# Altium PCB Exp 11a_Rev-1.PcbDoc
Units mm, origin at the board's own origin, x right, y up, seen from the top; angles counter-clockwise.
Board outline 134.49 x 84.46 mm, 2 copper layers (Top Layer, Bottom Layer); 44 components, 34 nets, 146 pads, 16 vias.
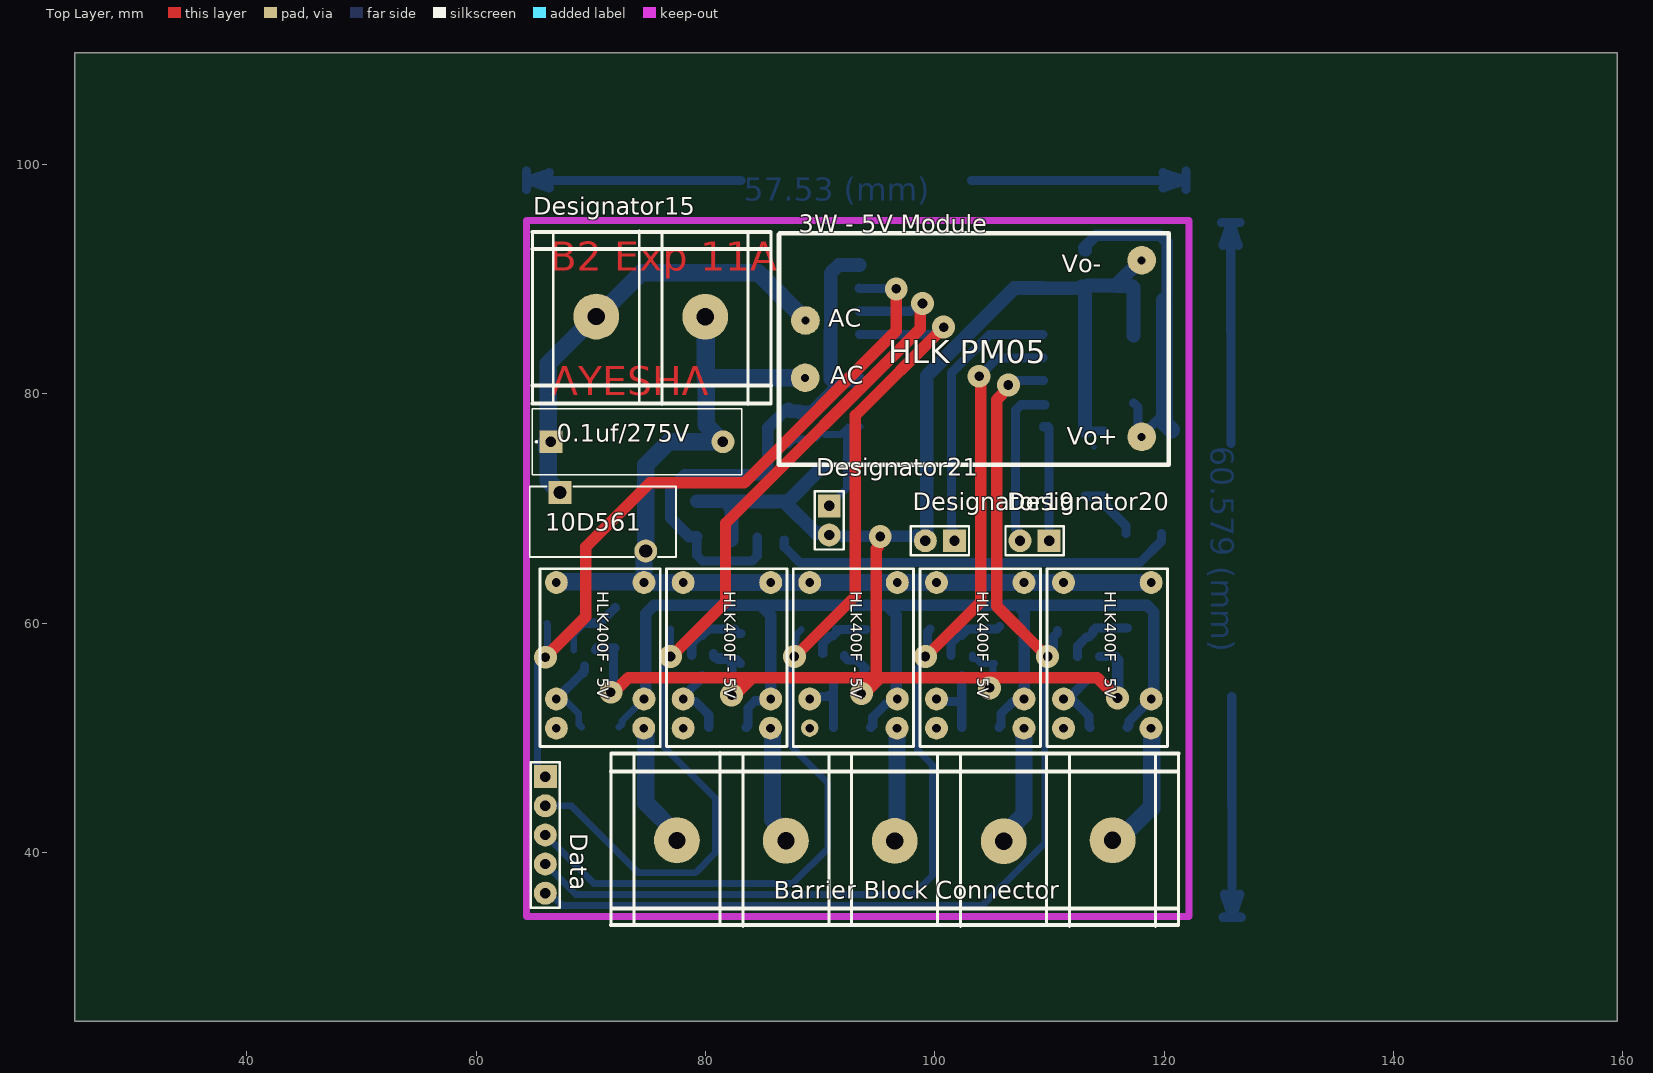
[diagram p0: Top Layer view]
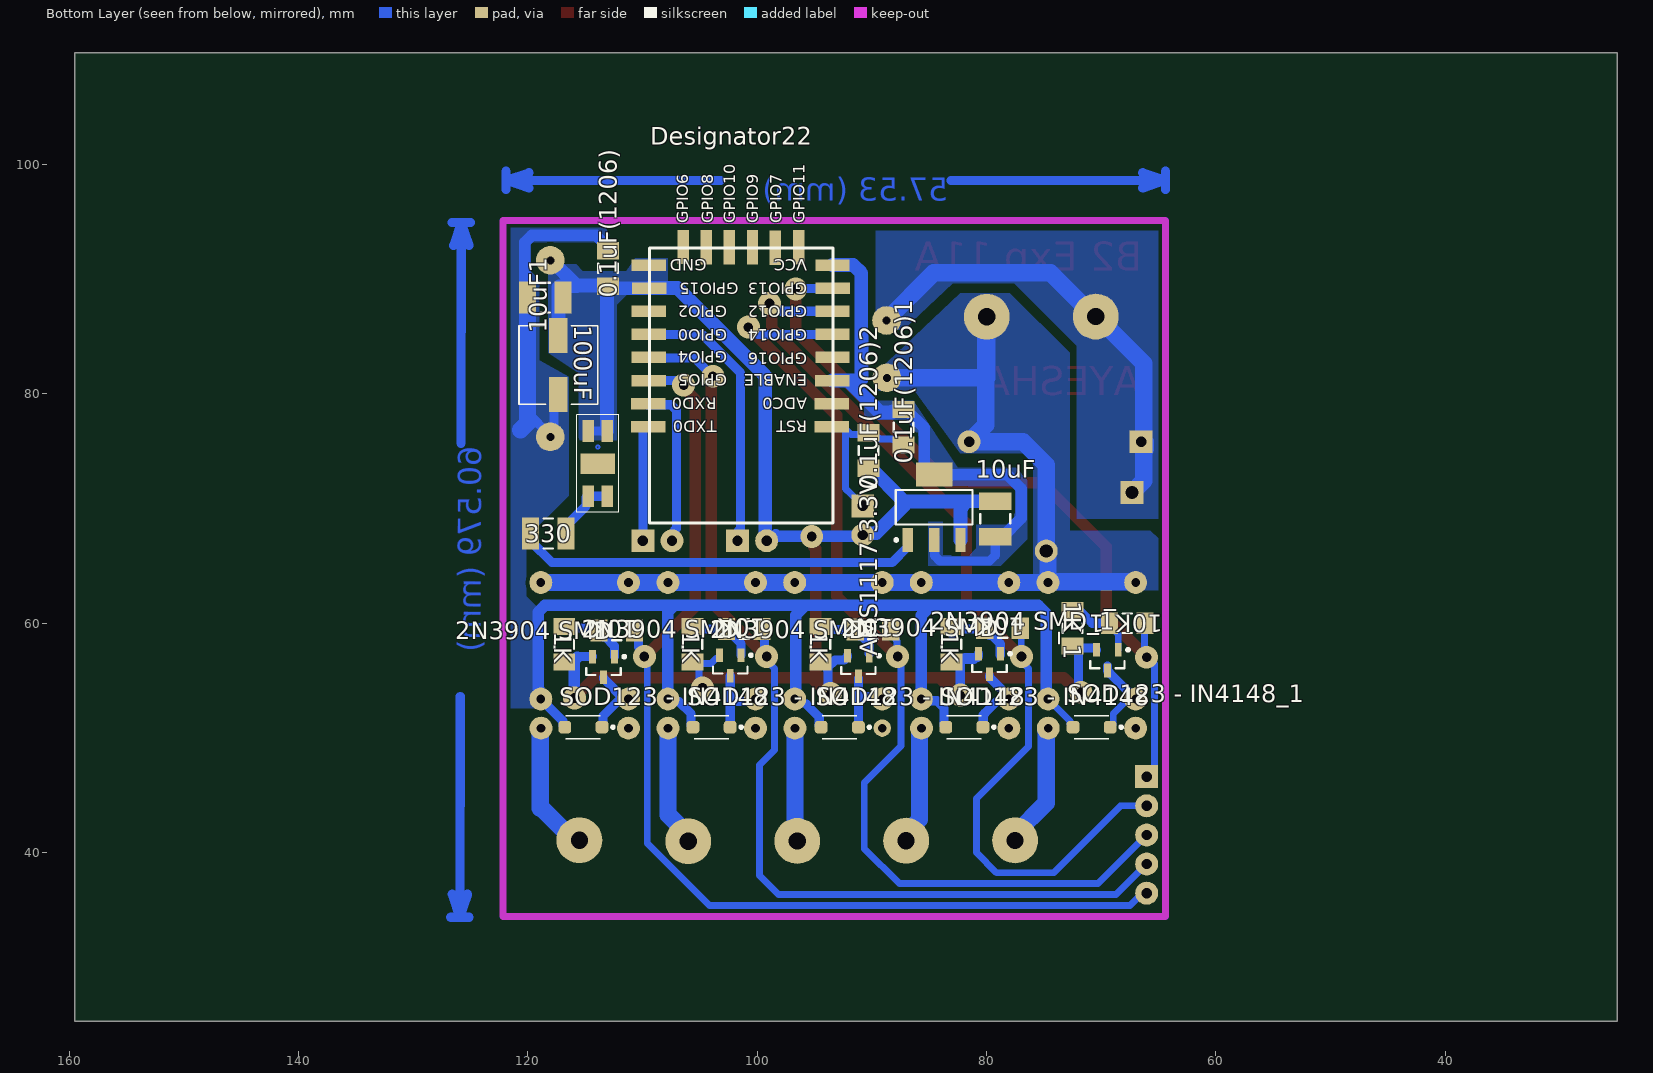
[diagram p1: Bottom Layer view, seen from below]

## Layer stack, top to bottom
Top Solder: solder mask 0.0102, Solder Resist, Dk 3.5
Top Layer: signal copper 0.0356
Dielectric 1: dielectric 0.32, FR-4, Dk 4.8
Bottom Layer: signal copper 0.0356
Bottom Solder: solder mask 0.0102, Solder Resist, Dk 3.5

## Board outline
25.019,25.273 159.512,25.273 159.512,109.728 25.019,109.728

## Design rules (kind name [scope] priority, off if disabled: settings)
Clearance [All] p1: gap=0.35 ignorepadtopadclearanceinfootprint=FALSE
PlaneClearance [All] p1: clearance=0.6
PlaneConnect [All] p1: planeconnectstyle=Direct reliefexpansion=0.508 reliefentries=4 reliefconductorwidth=0.254 reliefairgap=0.254
PolygonConnect PolygonConnect_2 [All] p1: connectstyle=Direct reliefconductorwidth=0.254 reliefentries=4 polygonreliefangle="90 Angle" airgapwidth=0.254
PolygonConnect PolygonConnect_1 [All] p2: connectstyle=Direct reliefconductorwidth=0.254 reliefentries=4 polygonreliefangle="90 Angle" airgapwidth=0.254
PolygonConnect [All] p3: connectstyle=Direct reliefconductorwidth=0.254 reliefentries=4 polygonreliefangle="90 Angle" airgapwidth=0.254
RoutingVias [All] p1: holewidth=0.711 width=1.27 viastyle="Through Hole" minholewidth=0.711 minwidth=1.27 maxholewidth=0.711 maxwidth=1.27
SolderMaskExpansion [All] p1: expansion=0.102 istentingtop=FALSE
Width [All] p1: maxlimit=1.5 minlimit=0.6 preferedwidth=1 minimp=50.000000 maximp=50.000000 favimp=50.000000
28 further rules are at their usual default settings.

## Components (designator, comment, footprint, x,y, rotation, side; value= is the part's Value field where it differs from the comment)
0.1uF(1206) "Comment" CAPC3216M 113.03,90.932 r90 bottom
0.1uF(1206)1 "Comment" CAPC3216M 87.249,77.089 r90 bottom
0.1uF(1206)2 "Comment" CAPC3216M 90.297,75.057 r90 bottom
0.1uf/275V "Comment" CAP_ECQ-UAAF104MA_PAN 66.534,75.819 r0 top
1K "Comment" RESC3216M 83.058,58.166 r270 bottom
1K "Comment" RESC3216M 94.488,58.166 r270 bottom
1K "Comment" RESC3216M 105.664,58.166 r270 bottom
1K "Comment" RESC3216M 116.84,58.166 r270 bottom
1K_1 "Comment" RESC3216M 72.517,59.563 r270 bottom
"2N3904 SMD" "Comment" SOT23-3L 79.756,56.432 r270 bottom
"2N3904 SMD" "Comment" SOT23-3L 91.186,56.261 r270 bottom
"2N3904 SMD" "Comment" SOT23-3L 102.362,56.305 r270 bottom
"2N3904 SMD" "Comment" SOT23-3L 113.411,56.178 r270 bottom
"2N3904 SMD_1" "Comment" SOT23-3L 69.469,56.769 r270 bottom
"3W - 5V Module" "Comment" HLK-PM05 103.378,83.947 r0 top
10D561 "Comment" MOV-10D561K_BRN 67.31,71.399 r0 top
10K "Comment" RESC3216M 78.613,59.563 r0 bottom
10K "Comment" RESC3216M 89.916,59.436 r0 bottom
10K "Comment" RESC3216M 101.14,59.479 r0 bottom
10K "Comment" RESC3216M 112.268,59.353 r0 bottom
10K_1 "Comment" RESC3216M 67.739,59.987 r0 bottom
10uF "Comment" CAPC3225M 79.248,69.088 r90 bottom
10uF1 "Comment" CAPC3225M 118.491,88.392 r180 bottom
100uF "Comment" CHEMI-F80 117.348,82.512 r270 bottom
330 "Comment" RESC3225M 118.237,67.818 r180 bottom
AMS1117-3.3V "Comment" SOT223-4L 84.582,70.104 r90 bottom
"Barrier Block Connector" "Comment" "Barrier Block Connector"#1 96.52,41.021 r90 top
Data "Comment" HDR1X5 66.04,46.609 r270 top
Designator15 "Comment" "Barrier Block Connector"#2 60.985,86.747 r270 top
Designator19 "Comment" HDR1X2 101.727,67.183 r180 top
Designator20 "Comment" HDR1X2 109.982,67.183 r180 top
Designator21 "Comment" HDR1X2 90.805,70.231 r270 top
Designator22 "Comment" esp8266-12F 101.473,84.963 r90 bottom
"SOD123 - IN4148" "Comment" SODFL3718X108N 81.966,50.927 r0 bottom
"SOD123 - IN4148" "Comment" SODFL3718X108N 92.831,50.927 r0 bottom
"SOD123 - IN4148" "Comment" SODFL3718X108N 104.013,50.927 r0 bottom
"SOD123 - IN4148" "Comment" SODFL3718X108N 115.189,50.927 r0 bottom
"SOD123 - IN4148_1" "Comment" SODFL3718X108N 70.866,50.927 r0 bottom
? "Comment" HLK400F-5V#1 115.062,57.194 r270 top
? "Comment" HLK400F-5V#2 92.921,57.194 r270 top
? "Comment" HLK400F-5V#1 103.977,57.194 r270 top
? "Comment" HLK400F-5V#1 81.879,57.194 r270 top
? "Comment" SMD-LED 113.919,73.914 r90 bottom
? "Comment" HLK400F-5V#1 70.823,57.194 r270 top

## Footprints (in the part's own frame and the unit in brackets; to place one, negate y for a bottom-side part, rotate by r counter-clockwise, add the part's x,y. Pads: shape width x height; smd on the part's side, far side on the other; paste and mask are expansions set on the pad)
"Barrier Block Connector"#1 [mm] "5 pin Barrier Block Connector"
  round 4 hole 1.5: 1(0.031,19) 2(0.006,9.5) 3(-0.019,0) 4(-0.044,-9.5) 5(0.044,-19)
  silkscreen extent -7.47,-24.75 7.68,24.75
"Barrier Block Connector"#2 [mm] "8 pin Barrier Block Connector"
  round 4 hole 1.5: 1(0.031,19) 2(0.006,9.5)
  silkscreen extent -7.47,3.94 7.68,24.75
CAP_ECQ-UAAF104MA_PAN [mm]
  rect 2x2 hole 0.914 mask+0: 1(0,0)
  round 2 hole 0.914 mask+0: 2(15,0)
  silkscreen extent -1.63,-2.88 16.63,2.88, body extent -1.5,-2.76 16.5,2.76, height 12.5
CAPC3216M [mm] "Chip Capacitor, Body 3.2x1.6mm, IPC Low Density"
  rect 1.5x1.9 smd: 1(-1.55,0) 2(1.55,0)
  silkscreen extent -0.4,-0.85 0.4,0.85, body extent -1.7,-0.9 1.7,0.9, height 1.35
CAPC3225M [mm] "Chip Capacitor, Body 3.2x2.5mm, IPC Low Density"
  rect 1.5x2.8 smd: 1(-1.55,0) 2(1.55,0)
  silkscreen extent -0.4,-1.3 0.4,1.3, body extent -1.7,-1.35 1.7,1.35, height 1.35
CHEMI-F80 [mil]
  rect 120x63 smd paste+0 mask+0: 1(-101.5,0) 2(101.5,0)
  silkscreen extent -135,-135 135,135, body extent -141,-130 141,130, height 305
esp8266-12F [mm]
  rect 1x3 smd: 0(-7.837,-7.979) 0(-7.836,8.029) 0(-5.812,-7.954) 0(-5.811,8.054) 0(-3.812,-8.004) 0(-3.811,8.004) 0(-1.787,-8.029) 0(-1.786,7.979) 0(0.212,-8.029) 0(0.213,7.979) 0(2.237,-8.029) 0(2.238,7.979) 0(4.237,-8.054) 0(4.238,7.954) 0(6.262,-8.029) 0(6.263,7.979)
  rect 3x1 smd: 0(7.787,-3.054) 0(7.812,-5.079) 0(7.812,-1.054) 0(7.812,0.971) 0(7.812,2.971) 0(7.838,4.996)
  silkscreen extent -16.24,-8.07 7.76,7.93
HDR1X2 [mm] "Connector; Header; 2 Position"
  rect 2x2 hole 0.9: 1(0,0)
  round 2 hole 0.9: 2(2.54,0)
  silkscreen extent -1.27,-1.27 3.81,1.27
HDR1X5 [mm] "Connector; Header; 5 Position"
  rect 2x2 hole 0.9: 1(0,0)
  round 2 hole 0.9: 2(2.54,0) 3(5.08,0) 4(7.62,0) 5(10.16,0)
  silkscreen extent -1.27,-1.27 11.43,1.27
HLK400F-5V#1 [mm]
  round 2 hole 0.762: "Coil B"(3.81,-3.817) CoilA(3.81,3.818) Common(-6.35,3.818) Common(-6.35,-3.817) NC(6.35,-3.817) NO(6.35,3.802)
  silkscreen extent -7.55,-5.26 7.95,5.24
HLK400F-5V#2 [mm]
  round 2 hole 0.762: "Coil B"(3.81,-3.817) CoilA(3.81,3.818) Common(-6.35,3.818) Common(-6.35,-3.817) NO(6.35,3.802)
  round 1.524 hole 0.762: NC(6.35,-3.817)
  silkscreen extent -7.55,-5.26 7.95,5.24
HLK-PM05 [mm]
  round 2.5 hole 0.7: 0(-14.65,2.45) 1(-14.675,-2.55) 2(14.675,7.7) 3(14.675,-7.7)
  silkscreen extent -16.96,-10.15 17.03,10.07
MOV-10D561K_BRN [mm]
  rect 2x2 hole 1.143 mask+0: 1(0,0)
  round 2 hole 1.143 mask+0: 2(7.493,-5.105)
  silkscreen extent -2.63,-5.63 10.12,0.52
RESC3216M [mm] "Chip Resistor, Body 3.2x1.6mm, IPC Low Density"
  rect 1.5x1.9 smd: 1(-1.55,0) 2(1.55,0)
  silkscreen extent -0.4,-0.85 0.4,0.85, body extent -1.68,-0.87 1.68,0.87, height 0.71
RESC3225M [mm] "Chip Resistor, Body 3.2x2.5mm, IPC Low Density"
  rect 1.5x2.8 smd: 1(-1.55,0) 2(1.55,0)
  silkscreen extent -0.4,-1.3 0.4,1.3, body extent -1.68,-1.32 1.68,1.32, height 0.71
SMD-LED [mm] "SMD LED PCB"
  rect 1.9x1 smd: 1(-2.85,0.82) 2(-2.85,-0.82) 3(2.85,-0.82) 4(2.85,0.82)
  rect 1.8x3 smd: 5(0,0)
  Top Layer circle w0.154: c1.441,-0.01 r0.149
  silkscreen extent -4.25,-1.84 4.25,1.82
SODFL3718X108N [mm]
  rrect50% 1.12x1.08 smd: A(1.6,0) C(-1.645,0)
  silkscreen extent -2.72,-1 1.5,1
SOT23-3L [mm] "SOT23, 3-Leads, Body 2.9x1.3mm, Pitch 0.95mm, Lead Span 2.5mm, IPC High Density"
  rect 1.2x0.6 smd: b(-0.9,0.95) c(0.9,0) e(-0.9,-0.95)
  silkscreen extent -1.02,-1.5 0.7,1.92, body extent -0.7,-1.5 0.7,1.5, height 1.1
SOT223-4L [mm] "SOT223, 4-Leads, Body 6.5x3.5mm, Pitch 2.3mm, Lead Span 7mm, IPC High Density"
  rect 2.1x0.9 smd: 1(-2.85,2.3) 2(-2.85,0) 3(-2.85,-2.3)
  rect 2.1x3.2 smd: 4(2.85,0)
  silkscreen extent -2.97,-3.35 1.5,3.43, body extent -1.85,-3.35 1.85,3.35, height 1.8

## Via types
v1: diameter 2, hole 0.85, Top Layer to Bottom Layer, 16 vias

## Nets (pads, with @x,y where several pads share a name; then routed paths per layer and width w, separated by ;. In a path a pad name is that pad's centre, name@x,y a point inside that pad or via, vN(x,y) a via of type N, cw(c..) or ccw(c..) an arc to the next point about the centre after c; other vN are vias at no path point)
"AC GND": 0.1uf/275V.1 10D561.1 "3W - 5V Module.0" Designator15.2 | length 39.3
  Bottom Layer w1.5: 0.1uf/275V.1@66.167,75.819 66.167,75.184 66.294,75.057 66.294,72.415 10D561.1 ; 0.1uf/275V.1@66.294,75.819 66.294,82.644 70.391,86.741 Designator15.2@70.579,86.741 ; Designator15.2 70.612,86.741 74.422,90.551 84.619,90.551 88.773,86.397
"AC Live": 0.1uf/275V.2 10D561.2 "3W - 5V Module.1" ?.Common Designator15.1 | length 95.8
  Bottom Layer w0.8: ?.Common@67.005,63.544 ?.Common@67.27,63.279
  Bottom Layer w1.5: ?.Common@67.013,63.545 67.017,63.548 67.539,63.548 67.593,63.602 74.576,63.602 74.634,63.544 ?.Common@74.64,63.544 ; ?.Common@74.484,63.602 74.647,63.765 10D561.2@74.647,66.265 ; ?.Common@74.549,63.544 78.062,63.544 85.697,63.544 89.103,63.544 96.738,63.544 100.16,63.544 107.795,63.544 ?.Common@111.209,63.544 ; 10D561.2@74.774,66.265 10D561.2 74.803,73.787 76.835,75.819 0.1uf/275V.2 80.079,77.274 80.079,81.397 80.079,86.622 Designator15.1 79.985,81.397 88.703,81.397 ; ?.Common@111.245,63.544 ?.Common@118.88,63.544
B1: 1K.1@116.84,59.716 10K.2@113.818,59.353 "2N3904 SMD.b"@112.461,57.078 | length 6
  Bottom Layer w0.8: 112.461,57.078 112.461,57.996 113.268,58.803 113.468,58.803 113.818,59.153 113.818,59.353 114.028,59.563 1K.1@116.822,59.563
B2: 1K.1@105.664,59.716 10K.2@102.69,59.479 "2N3904 SMD.b"@101.412,57.205 | length 6
  Bottom Layer w0.8: 101.412,57.205 101.412,58.201 102.14,58.929 102.34,58.929 102.69,59.279 102.69,59.479 105.427,59.479 1K.1@105.664,59.716
B3: 1K.1@94.488,59.716 10K.2@91.466,59.436 "2N3904 SMD.b"@90.236,57.161 | length 5.2
  Bottom Layer w0.8: 90.236,57.361 90.236,58.206 90.916,58.886 91.116,58.886 91.466,59.236 91.466,59.436 1K.1@94.013,59.436
B4: 1K.1@83.058,59.716 10K.2@80.163,59.563 "2N3904 SMD.b"@78.806,57.332 | length 6.1
  Bottom Layer w0.8: 78.806,57.205 78.806,58.201 79.534,58.929 79.734,58.929 80.084,59.279 80.084,59.479 82.525,59.479 82.906,59.098 1K.1@83.106,59.098
B5: 1K_1.1 10K_1.2 "2N3904 SMD_1.b" | length 6
  Bottom Layer w0.6: 68.519,57.669 68.519,59.017 69.289,59.787 10K_1.2
  Bottom Layer w0.8: 10K_1.2 70.782,59.987 1K_1.1@72.136,61.341
C1: "2N3904 SMD.c"@113.411,55.278 "?.Coil B"@111.245,53.384 "SOD123 - IN4148.C"@113.544,50.927 | length 6.4
  Bottom Layer w0.8: 111.245,53.384 111.245,53.519 ; 111.251,53.384 111.481,53.154 112.2,53.154 113.466,51.888 113.466,51.005 113.544,50.927 ; 111.753,53.519 113.411,55.178 113.411,55.278
C2: "2N3904 SMD.c"@102.362,55.405 "?.Coil B"@100.16,53.384 "SOD123 - IN4148.C"@102.368,50.927 | length 6.3
  Bottom Layer w0.8: 100.16,53.384 100.39,53.154 101.854,53.154 ; 102.362,55.405 102.362,50.933 102.368,50.927
C3: "2N3904 SMD.c"@91.186,55.361 "?.Coil B"@89.103,53.384 "SOD123 - IN4148.C"@91.186,50.927 | length 6.6
  Bottom Layer w0.8: 89.103,53.384 89.333,53.613 90.707,53.613 90.805,53.711 91.186,53.33 ; 91.186,50.927 91.186,53.33 ; 91.186,55.161 91.186,53.33
C4: "2N3904 SMD.c"@79.756,55.532 "?.Coil B"@78.062,53.384 "SOD123 - IN4148.C"@80.321,50.927 | length 6.6
  Bottom Layer w0.8: 79.756,55.405 79.756,55.305 78.062,53.611 78.062,53.384 78.292,53.154 79.15,53.154 80.158,52.146 80.158,52.126 80.298,51.986 80.298,50.95 80.321,50.927
C5: "2N3904 SMD_1.c" "?.Coil B"@67.005,53.384 "SOD123 - IN4148_1.C" | length 7.5
  Bottom Layer w0.6: 67.005,53.384 67.273,53.116 67.915,53.116 68.961,52.07 68.961,51.167 69.201,50.927 69.221,50.927
  Bottom Layer w0.8: 67.005,53.384 69.291,55.669 69.369,55.669 ; 69.469,55.847 69.469,56.261
"DC GND": 0.1uF(1206)2.1 0.1uF(1206).1 1K.2 1K_1.2 10uF1.2 10uF.2 100uF.1 "2N3904 SMD.e" "2N3904 SMD_1.e" "3W - 5V Module.2" ?.3 ?.4 AMS1117-3.3V.3 Designator19.2 Designator21.2 Designator22.0@109.427,89.201 Designator22.0@109.452,91.226 | length 178.3
  Top Layer w1: v1(71.755,53.975) 72.026,53.975 73.284,55.234 84.079,55.234 ; v1(82.296,53.721) 82.567,53.721 84.079,55.234 ; v1(93.599,53.848) 93.87,53.848 95.255,55.234 ; v1(95.25,67.564) 95.059,67.373 95.059,66.666 94.888,66.495 94.888,55.6 95.255,55.234 ; v1(115.951,53.467) 115.948,53.467 114.182,55.234 95.255,55.234 ; 84.079,55.234 95.255,55.234
  Bottom Layer w0.6: 103.312,57.205 103.312,56.905 103.612,56.905 104.042,56.475 105.214,56.475 105.073,56.334 v1@105.073,55.033
  Bottom Layer w0.8: 70.419,57.669 70.519,57.769 70.519,57.845 72.121,57.845 71.985,57.709 71.985,54.205 v1(71.755,53.975) ; 10uF.2@79.655,70.612 79.75,70.517 81.756,70.517 82.156,70.117 ; 80.706,57.205 80.706,57.105 80.806,57.005 80.933,57.005 ; 80.706,57.332 80.706,57.232 80.933,57.005 ; v1(82.296,53.721) 82.296,56.608 82.065,56.839 ; 1K.2@83.058,56.489 82.708,56.839 82.065,56.839 ; 92.136,57.161 92.136,57.061 92.424,56.773 93.231,56.773 93.938,56.066 93.829,55.957 93.829,54.078 v1(93.599,53.848) ; ?.3@113.199,76.764 ?.4 ; 114.361,57.078 115.634,57.078 115.697,57.015 ; 80.933,57.005 81.899,57.005 82.065,56.839 ; 80.933,57.005 81.099,56.839 82.065,56.839
  Bottom Layer w1: Designator21.2 90.932,67.564 v1(95.25,67.564) 98.281,67.564 98.408,67.691 98.916,67.183 Designator19.2 ; 115.697,57.015 115.951,56.761 v1(115.951,53.467)
  Bottom Layer w1.2: 10uF.2 79.266,70.62 81.653,70.62 81.661,70.612 82.156,70.612 87.202,70.612 90.097,73.507 90.297,73.507 ; 82.156,70.117 82.282,69.991 AMS1117-3.3V.3 ; 87.121,70.358 89.635,67.844 Designator21.2@90.805,67.844 ; Designator19.2 99.314,67.31 99.314,81.583 106.959,89.227 109.401,89.227 109.427,89.201 112.649,89.201 112.83,89.382 113.03,89.382 ; ?.3@113.199,76.764 ?.3 113.099,89.232 113.324,89.457 115.78,89.457 117.97,91.647 118.053,91.647 ; 115.78,89.382 117.254,89.382 117.348,89.288 100uF.1
  other v1: 104.775,54.356
FLASH: Designator19.1 Designator22.0@109.452,85.176 | length 24.3
  Bottom Layer w0.8: Designator19.1@102.235,67.183 101.635,67.783 101.635,68.087 101.47,68.252 101.47,81.829 104.817,85.176 Designator22.0@109.452,85.176
GPIO4: 10K.1@99.59,59.479 Data.4 Designator22.0@109.452,83.177 | length 93.3
  Top Layer w1: Data.4 Data.4@66.231,38.798 ; v1(99.181,57.084) 99.248,57.084 104.013,61.849 104.013,81.4 v1(103.879,81.534)
  Bottom Layer w0.6: Data.4 68.702,36.327 98.146,36.327 99.822,38.003 99.822,47.625 98.51,48.937 98.51,56.033 99.181,56.705 v1@99.181,57.249 ; v1@99.386,57.275 10K.1@99.386,59.275
  Bottom Layer w0.8: v1(99.181,57.084) 99.386,57.288 99.386,59.275 10K.1@99.59,59.479 ; v1(103.879,81.534) 105.463,83.117 109.393,83.117 Designator22.0@109.452,83.177
GPIO5: 10K.1@110.718,59.353 Data.5 Designator22.0@109.477,81.152 | length 94.5
  Top Layer w1: v1(106.426,80.772) 106.426,80.501 105.41,79.485 105.41,61.468 109.794,57.084 v1(109.855,57.084)
  Bottom Layer w0.6: Data.5 66.419,36.449 67.491,35.377 104.167,35.377 109.601,40.811 109.601,50.154 109.595,50.16 109.595,56.763 109.855,57.023 v1(109.855,57.084)
  Bottom Layer w0.8: v1(106.426,80.772) 106.624,80.772 107.003,81.152 Designator22.0@109.477,81.152 ; v1(109.855,57.084) 109.855,57.408 110.368,57.921 110.368,58.803 110.718,59.153 10K.1@110.718,59.353
GPIO12: 10K.1@77.063,59.563 Data.2 Designator22.0@93.444,87.2 | length 85.6
  Top Layer w1: Data.2 Data.2@66.311,44.069 ; v1(76.957,57.084) 77.023,57.084 81.757,61.818 81.757,68.692 98.742,85.677 98.742,87.693 v1(98.933,87.884)
  Bottom Layer w0.6: Data.2 68.326,44.069 74.168,38.227 79.121,38.227 80.899,40.005 80.899,44.704 76.348,49.255 76.348,56.031 76.957,56.639 v1(76.957,57.084) ; v1@76.984,57.052 10K.1@76.984,59.479
  Bottom Layer w0.8: Designator22.0@93.444,87.2 97.925,87.2 98.608,87.884 v1(98.933,87.884)
GPIO13: 10K_1.1 Data.1 Designator22.0@93.419,89.2 | length 67.3
  Top Layer w1: Data.1 Data.1@66.484,47.053 ; v1(66.04,57.023) 69.565,60.548 69.565,66.644 75.153,72.232 83.388,72.232 96.647,85.492 96.647,88.756 v1@96.52,88.883
  Bottom Layer w0.6: Data.1 65.355,47.294 65.355,56.48 66.04,57.164 66.04,57.531 66.241,57.732 66.241,59.934 10K_1.1
  Bottom Layer w0.8: Designator22.0@93.419,89.2 93.442,89.177 96.624,89.177 v1(96.647,89.154)
GPIO14: 10K.1@88.366,59.436 Data.3 Designator22.0@93.444,85.175 | length 90.2
  Top Layer w1: v1(87.757,57.084) 87.818,57.084 93.091,62.357 93.091,78.117 v1(100.783,85.809)
  Bottom Layer w0.6: Data.3 70.292,37.277 87.599,37.277 90.678,40.356 90.678,46.066 87.453,49.291 87.453,56.261 87.489,56.297 87.489,56.816 87.832,57.159 87.832,58.435 87.916,58.518 87.916,58.986 10K.1@88.366,59.436
  Bottom Layer w0.8: Designator22.0@93.444,85.175 99.964,85.175 100.598,85.809 v1(100.783,85.809)
LED-R: 330.2 ?.1 ?.2 | length 5.7
  Bottom Layer w0.8: ?.2 ?.1 ; ?.1@114.84,71.064 114.94,70.964 114.94,70.215 116.687,68.468 330.2
NO1: "Barrier Block Connector.5" ?.NO@118.864,50.844 | length 11.5
  Bottom Layer w1.5: 115.52,41.065 116.02,41.065 118.804,43.849 ; ?.NO@118.853,50.844 118.858,50.844 118.931,50.771 118.931,43.849
NO2: "Barrier Block Connector.4" ?.NO@107.78,50.844 | length 10.6
  Bottom Layer w1.5: 106.02,40.977 106.02,41.518 107.78,43.278 ?.NO@107.78,50.844
NO3: "Barrier Block Connector.3" ?.NO@96.723,50.844 | length 10
  Bottom Layer w1.5: 96.596,41.186 96.824,40.958 ; 96.723,41.186 ?.NO@96.723,50.844
NO4: "Barrier Block Connector.2" ?.NO@85.682,50.844 | length 10.4
  Bottom Layer w1.5: ?.NO@85.682,50.844 85.778,50.748 85.778,50.394 85.852,50.32 85.852,42.872 87.02,41.704 87.02,41.027
NO5: "Barrier Block Connector.1" ?.NO@74.625,50.844 | length 11
  Bottom Layer w1.5: ?.NO@74.625,50.844 74.625,50.708 74.803,50.531 74.803,44.323 77.52,41.606 77.52,41.052
"P +Vo": 
"P -Vo": 
RST: 0.1uF(1206)1.1 0.1uF(1206)2.2 Designator21.1 Designator22.0@93.494,77.126 | length 14.3
  Bottom Layer w0.6: 87.249,75.539 87.699,75.989 88.166,75.989 88.25,76.073 89.296,76.073 89.38,76.157 89.647,76.157 90.097,76.607 90.297,76.607 90.45,76.454 91.823,76.454 Designator22.0@92.294,76.926 ; Designator21.1 91.892,71.318 92.294,71.72 Designator22.0@92.294,76.926 ; Designator22.0@93.494,77.126 92.494,77.126 Designator22.0@92.294,76.926
RXD0: Designator20.2 Designator22.0@109.527,79.152 | length 14.3
  Bottom Layer w0.8: Designator20.2 107.212,67.413 107.212,68.1 107.061,68.252 107.061,78.583 107.53,79.052 Designator22.0@109.609,79.052
SOT-Vin: 
SOT-Vout: 
TXD0: Designator20.1 Designator22.0@109.502,77.127 | length 10.4
  Bottom Layer w0.8: Designator22.0@109.502,77.127 109.882,77.127 109.982,77.027 Designator20.1
"VCC 3V": 0.1uF(1206)1.2 10uF.1 AMS1117-3.3V.2 AMS1117-3.3V.4 Designator22.0@93.444,91.225 Designator22.0@93.469,81.151 | length 50.4
  Bottom Layer w0.8: 10uF.1 79.248,65.913 79.756,65.405 84.063,65.405 84.532,65.874 AMS1117-3.3V.2@84.532,67.485
  Bottom Layer w1: 10uF.1 78.598,67.538 76.998,69.138 76.998,71.74 78.212,72.954 AMS1117-3.3V.4 84.899,72.954 85.449,73.504 85.449,77.039 87.049,78.639 87.249,78.639
  Bottom Layer w1.2: 87.249,78.639 87.399,78.489 88.18,78.489 88.302,78.367 89.296,78.367 Designator22.0@92.082,81.153 ; Designator22.0@93.444,91.225 91.631,91.225 90.928,90.523 90.928,85.486 90.903,85.461 90.903,81.269 91.019,81.153 Designator22.0@92.082,81.153 ; Designator22.0@93.469,81.151 93.467,81.153 Designator22.0@92.082,81.153
"VCC 5V": 0.1uF(1206).2 10uF1.1 100uF.2 330.1 "3W - 5V Module.3" "SOD123 - IN4148.A" "SOD123 - IN4148_1.A" ?.CoilA AMS1117-3.3V.1 | length 170.1
  Bottom Layer w0.6: 72.466,50.927 72.486,50.927 72.726,51.167 72.726,51.469 72.975,51.719 ?.CoilA@74.411,53.154 ; 95.717,52.918 95.894,52.918 96.36,53.384 ?.CoilA@96.738,53.384
  Bottom Layer w0.8: ?.CoilA@74.411,53.154 ?.CoilA@74.64,53.384 ; 83.566,50.927 83.586,50.927 83.726,51.067 83.726,52.611 84.342,53.227 85.541,53.227 ?.CoilA@85.697,53.384 ; AMS1117-3.3V.1 86.882,66.654 88.242,65.294 111.842,65.294 111.858,65.278 117.897,65.278 119.787,67.168 330.1 ; 94.431,50.927 94.451,50.927 94.591,51.067 94.591,51.792 95.717,52.918 ; 105.613,50.927 105.633,50.927 105.773,51.067 105.773,52.098 106.829,53.154 107.565,53.154 ?.CoilA@107.795,53.384 ; 116.789,50.927 116.809,50.927 116.949,51.067 116.949,51.453 ?.CoilA@118.88,53.384 ; 100uF.2@117.348,79.21 117.728,78.83 117.728,76.572 ; 118.046,76.334 120.041,78.33
  Bottom Layer w1: ?.CoilA@74.64,53.384 74.803,53.546 74.803,60.833 75.51,61.54 84.836,61.54 ; ?.CoilA@85.697,53.384 85.697,60.679 84.836,61.54 ; ?.CoilA@96.738,53.384 96.647,53.475 96.647,60.706 95.813,61.54 ; ?.CoilA@107.795,53.384 107.823,53.412 107.823,60.96 107.243,61.54 ; 113.03,92.482 113.23,92.482 112.981,92.731 114.066,93.815 119.683,93.815 120.269,93.229 120.269,88.616 10uF1.1@119.916,88.263 ; ?.CoilA@118.88,53.384 119.071,53.575 119.071,54.282 119.126,54.337 119.126,60.954 118.54,61.54 107.243,61.54 ; 84.836,61.54 95.813,61.54 ; 95.813,61.54 107.243,61.54
  Bottom Layer w1.5: 10uF1.1@120.041,88.138 120.041,78.33 120.041,77.447 120.65,76.838
pads on no net: ?.5 ?.NC Designator22.0@93.444,83.176 Designator22.0@93.519,79.151 Designator22.0@96.394,92.775 Designator22.0@98.419,92.75 Designator22.0@100.419,92.775 Designator22.0@102.444,92.775 Designator22.0@104.444,92.775 Designator22.0@106.469,92.801 Designator22.0@109.452,87.201
copper on no net: | length 99.2
  Bottom Layer w0.8: 64.39,97.817 64.39,99.417 ; 66.39,97.95 64.39,98.617 ; 66.39,99.284 64.39,98.617 ; 83.104,98.617 64.39,98.617 ; 103.206,98.617 121.92,98.617 ; 119.92,97.95 121.92,98.617 ; 119.92,99.284 121.92,98.617 ; 121.92,97.817 121.92,99.417 ; 125.017,94.929 126.617,94.932 ; 125.144,34.35 126.744,34.353 ; 125.154,92.929 125.817,94.931 ; 125.273,36.35 125.944,34.352 ; 125.857,75.692 125.817,94.931 ; 125.903,53.59 125.944,34.352 ; 126.488,92.932 125.817,94.931 ; 126.606,36.353 125.944,34.352

## Polygon pours and split planes (outlines as drawn)
no net on Top Layer "NONET_L01_P000" (solid, remove dead copper, pour order 0): 71.374,50.292
"VCC 3V" on Bottom Layer "VCC_3V_L02_P006" (solid, remove dead copper, pour order 6): 86.406,79.375 82.504,73.533 77.47,73.533 76.454,72.517 76.454,65.024 85.09,65.024 85.09,68.834 83.82,68.834 83.82,65.913 81.534,65.913 80.899,66.548 80.899,68.58 78.105,68.58 77.575,69.11 77.575,71.878 85.725,72 85.725,76.073 86.995,77.724 90.678,77.724 90.678,79.375
"AC Live" on Bottom Layer "AC_LIVE_L02_P002" (solid, remove dead copper, pour order 2): 65.151,68.072 72.771,68.072 72.771,83.566 77.978,88.773 82.296,88.773 89.408,82.042 89.408,80.264 86.255,80.264 82.296,74.803 75.946,74.803 75.946,62.865 65.024,62.865 65.024,67.564 64.77,67.818
"DC GND" on Bottom Layer "DC_GND_L02_P004" (solid, remove dead copper, pour order 4): 118.237,90.043 118.237,83.566 115.57,81.788 115.57,76.2 115.824,75.946 112.268,75.946 112.268,87.757 111.379,88.646 107.823,88.646 107.823,91.821 109.347,91.821 110.656,91.821 111.425,90.678 115.214,90.678 115.807,91.313 118.237,91.313
"VCC 5V" on Bottom Layer "VCC_5V_L02_P005" (solid, remove dead copper, pour order 5): 113.538,93.218 112.141,94.615 121.793,94.615 121.793,52.578 118.618,52.578 118.618,60.833 120.142,62.357 120.142,67.437 116.459,71.12 116.459,81.48 118.999,82.931 118.999,89.916 119.761,90.678 119.761,93.218 116.967,93.218
"AC GND" on Bottom Layer "AC_GND_L02_P003" (solid, remove dead copper, pour order 3): 65.024,69.088 72.136,69.088 72.136,84.201 77.597,89.662 82.947,89.662 87.265,85.598 89.662,85.598 89.662,94.234 65.024,94.234

## Keep-outs
Keep-Out Layer:
  lines w0.6: 64.389,34.417 64.389,95.123 122.174,95.123 122.174,34.417 64.389,34.417

## Other copper
Top Layer:
  text "B2 Exp 11A" at 66.413,90.741 h2.5
  text "AYESHA" at 66.54,79.875 h2.5
Bottom Layer:
  text "57.53 (mm)" at 83.358,96.817 h2
  text "60.579 (mm)" at 124.058,75.434 h2 r270.12

## Text inside footprints (layer, text, board x,y; h text height)
"3W - 5V Module": Top Overlay "HLK PM05" at 95.934,82.687 h2; Top Overlay "AC" at 90.909,80.887 h1.52; Top Overlay "AC" at 90.709,85.837 h1.52; Top Overlay "Vo+" at 111.509,75.562 h1.52; Top Overlay "Vo-" at 111.078,90.622 h1.52
Designator22: Bottom Overlay "VCC" at 95.653,91.731 h1.02 r180; Bottom Overlay "GPIO13" at 95.653,89.699 h1.02 r180; Bottom Overlay "GPIO12" at 95.653,87.667 h1.02 r180; Bottom Overlay "GPIO14" at 95.653,85.635 h1.02 r180; Bottom Overlay "GPIO16" at 95.653,83.603 h1.02 r180; Bottom Overlay "ENABLE" at 95.653,81.698 h1.02 r180; Bottom Overlay "ADC0" at 95.653,79.666 h1.02 r180; Bottom Overlay "RST" at 95.653,77.634 h1.02 r180; Bottom Overlay "TXD0" at 103.527,77.634 h1.02 r180; Bottom Overlay "RXD0" at 103.527,79.666 h1.02 r180; Bottom Overlay "GPIO5" at 102.638,81.698 h1.02 r180; Bottom Overlay "GPIO4" at 102.638,83.73 h1.02 r180; Bottom Overlay "GPIO0" at 102.638,85.635 h1.02 r180; Bottom Overlay "GPIO2" at 102.638,87.667 h1.02 r180; Bottom Overlay "GPIO15" at 101.622,89.699 h1.02 r180; Bottom Overlay "GND" at 104.416,91.731 h1.02 r180; Bottom Overlay "GPIO11" at 95.848,94.891 h1.02 r270; Bottom Overlay "GPIO7" at 97.88,94.891 h1.02 r270; Bottom Overlay "GPIO9" at 99.912,94.891 h1.02 r270; Bottom Overlay "GPIO10" at 101.944,94.891 h1.02 r270; Bottom Overlay "GPIO8" at 103.849,94.891 h1.02 r270; Bottom Overlay "GPIO6" at 106.008,94.891 h1.02 r270
?: Top Overlay "HLK400F - 5V" at 114.816,62.782 h1.02 r270
?: Top Overlay "HLK400F - 5V" at 92.674,62.782 h1.02 r270
?: Top Overlay "HLK400F - 5V" at 103.731,62.782 h1.02 r270
?: Top Overlay "HLK400F - 5V" at 81.633,62.782 h1.02 r270
?: Top Overlay "HLK400F - 5V" at 70.576,62.782 h1.02 r270